# Allegro board TRS80_POWER2.brd
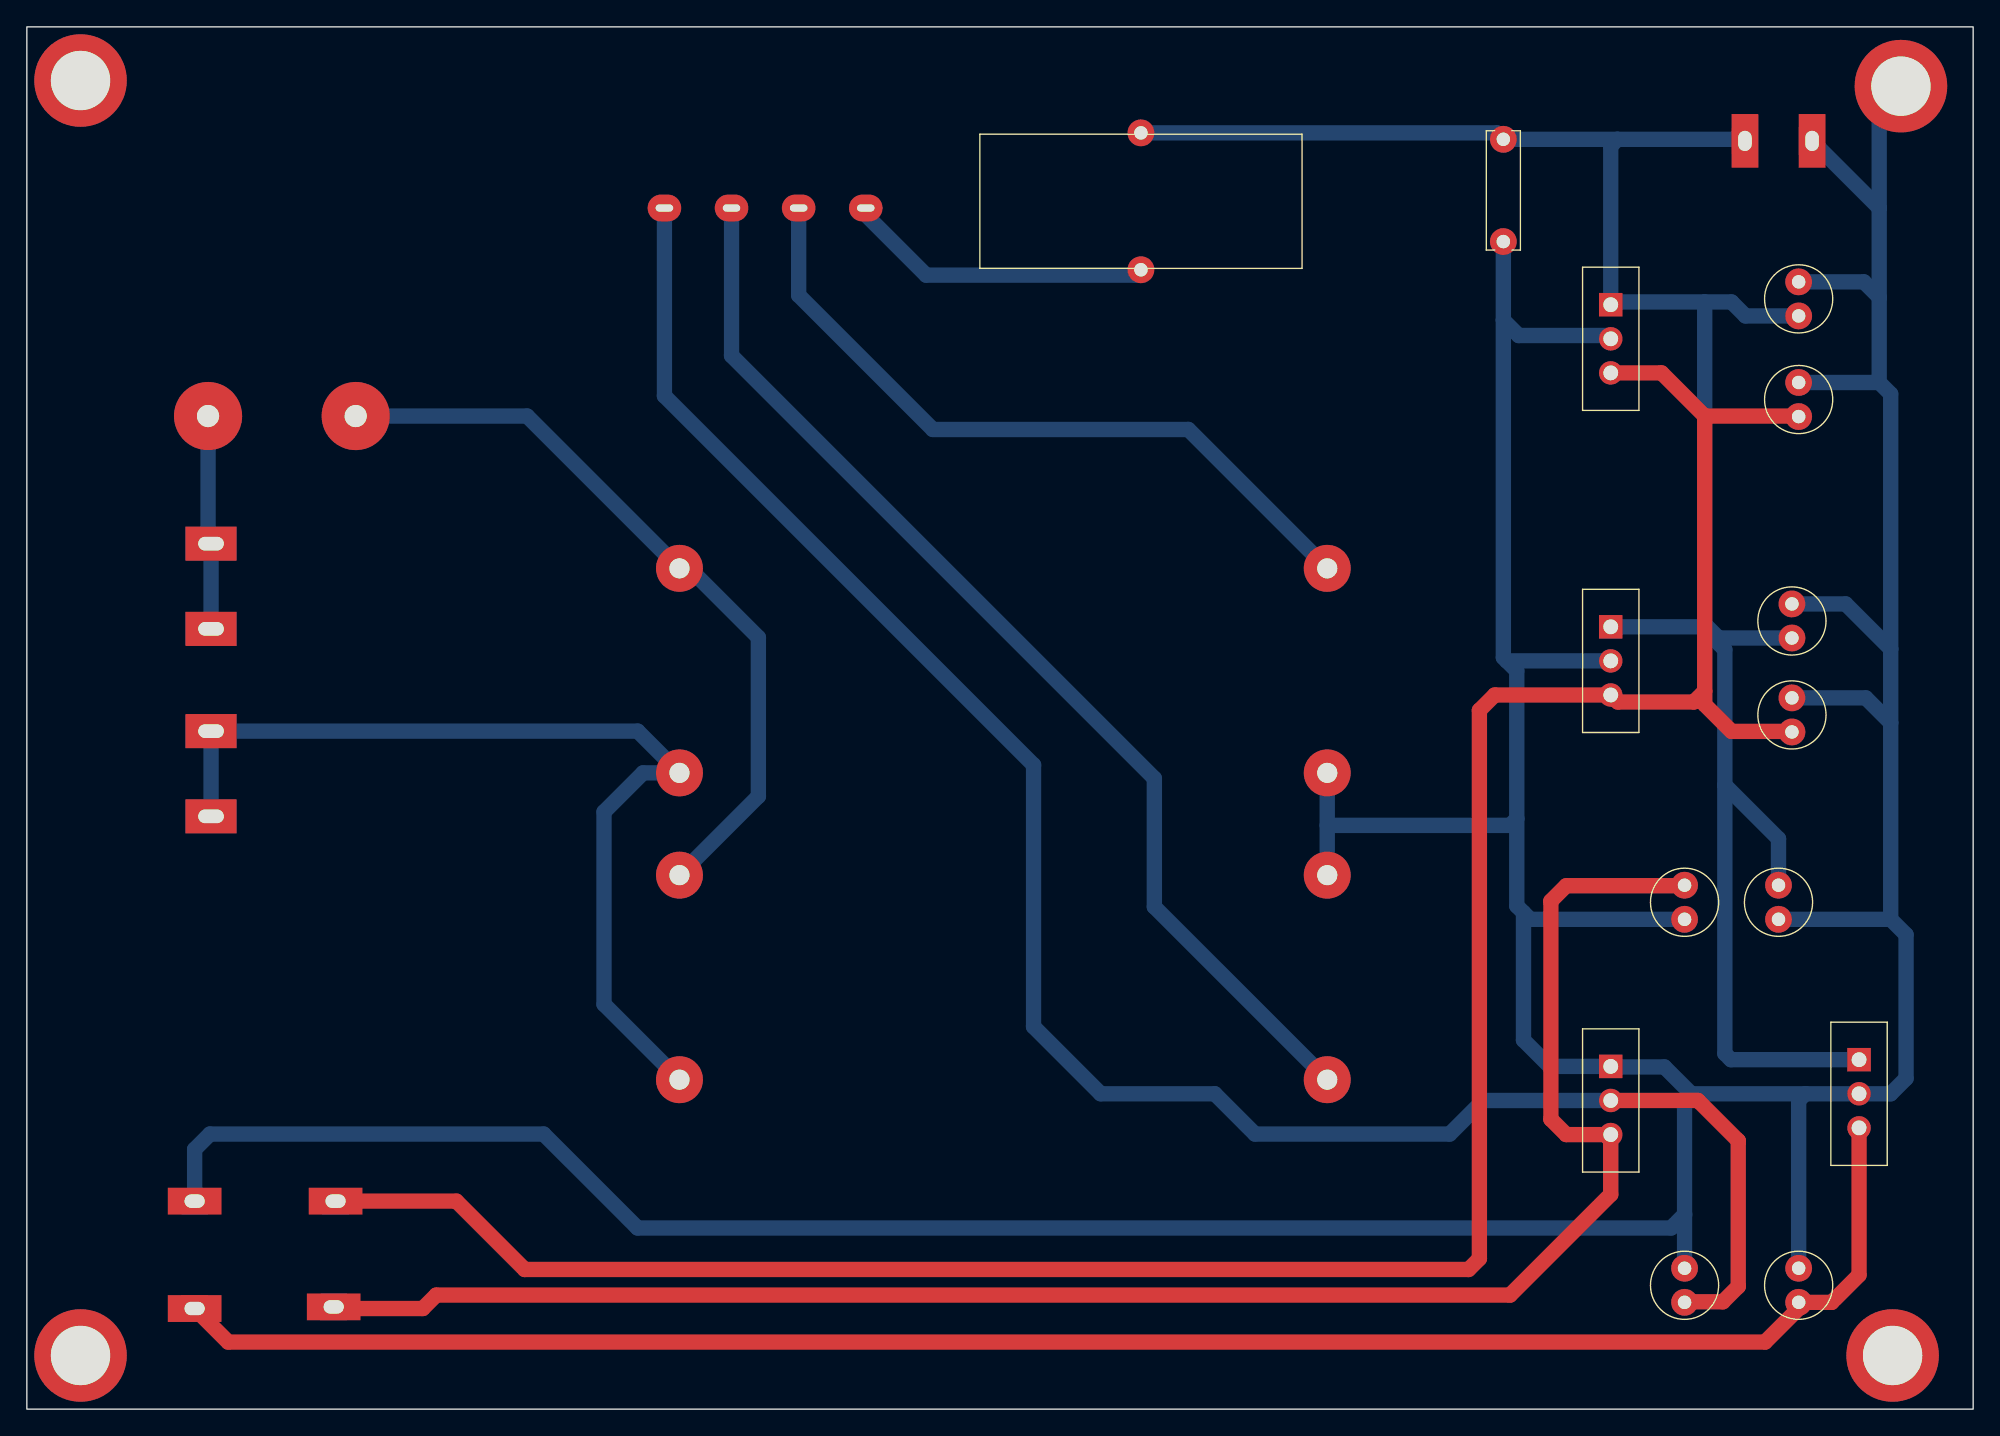
[diagram p0: board, top side]
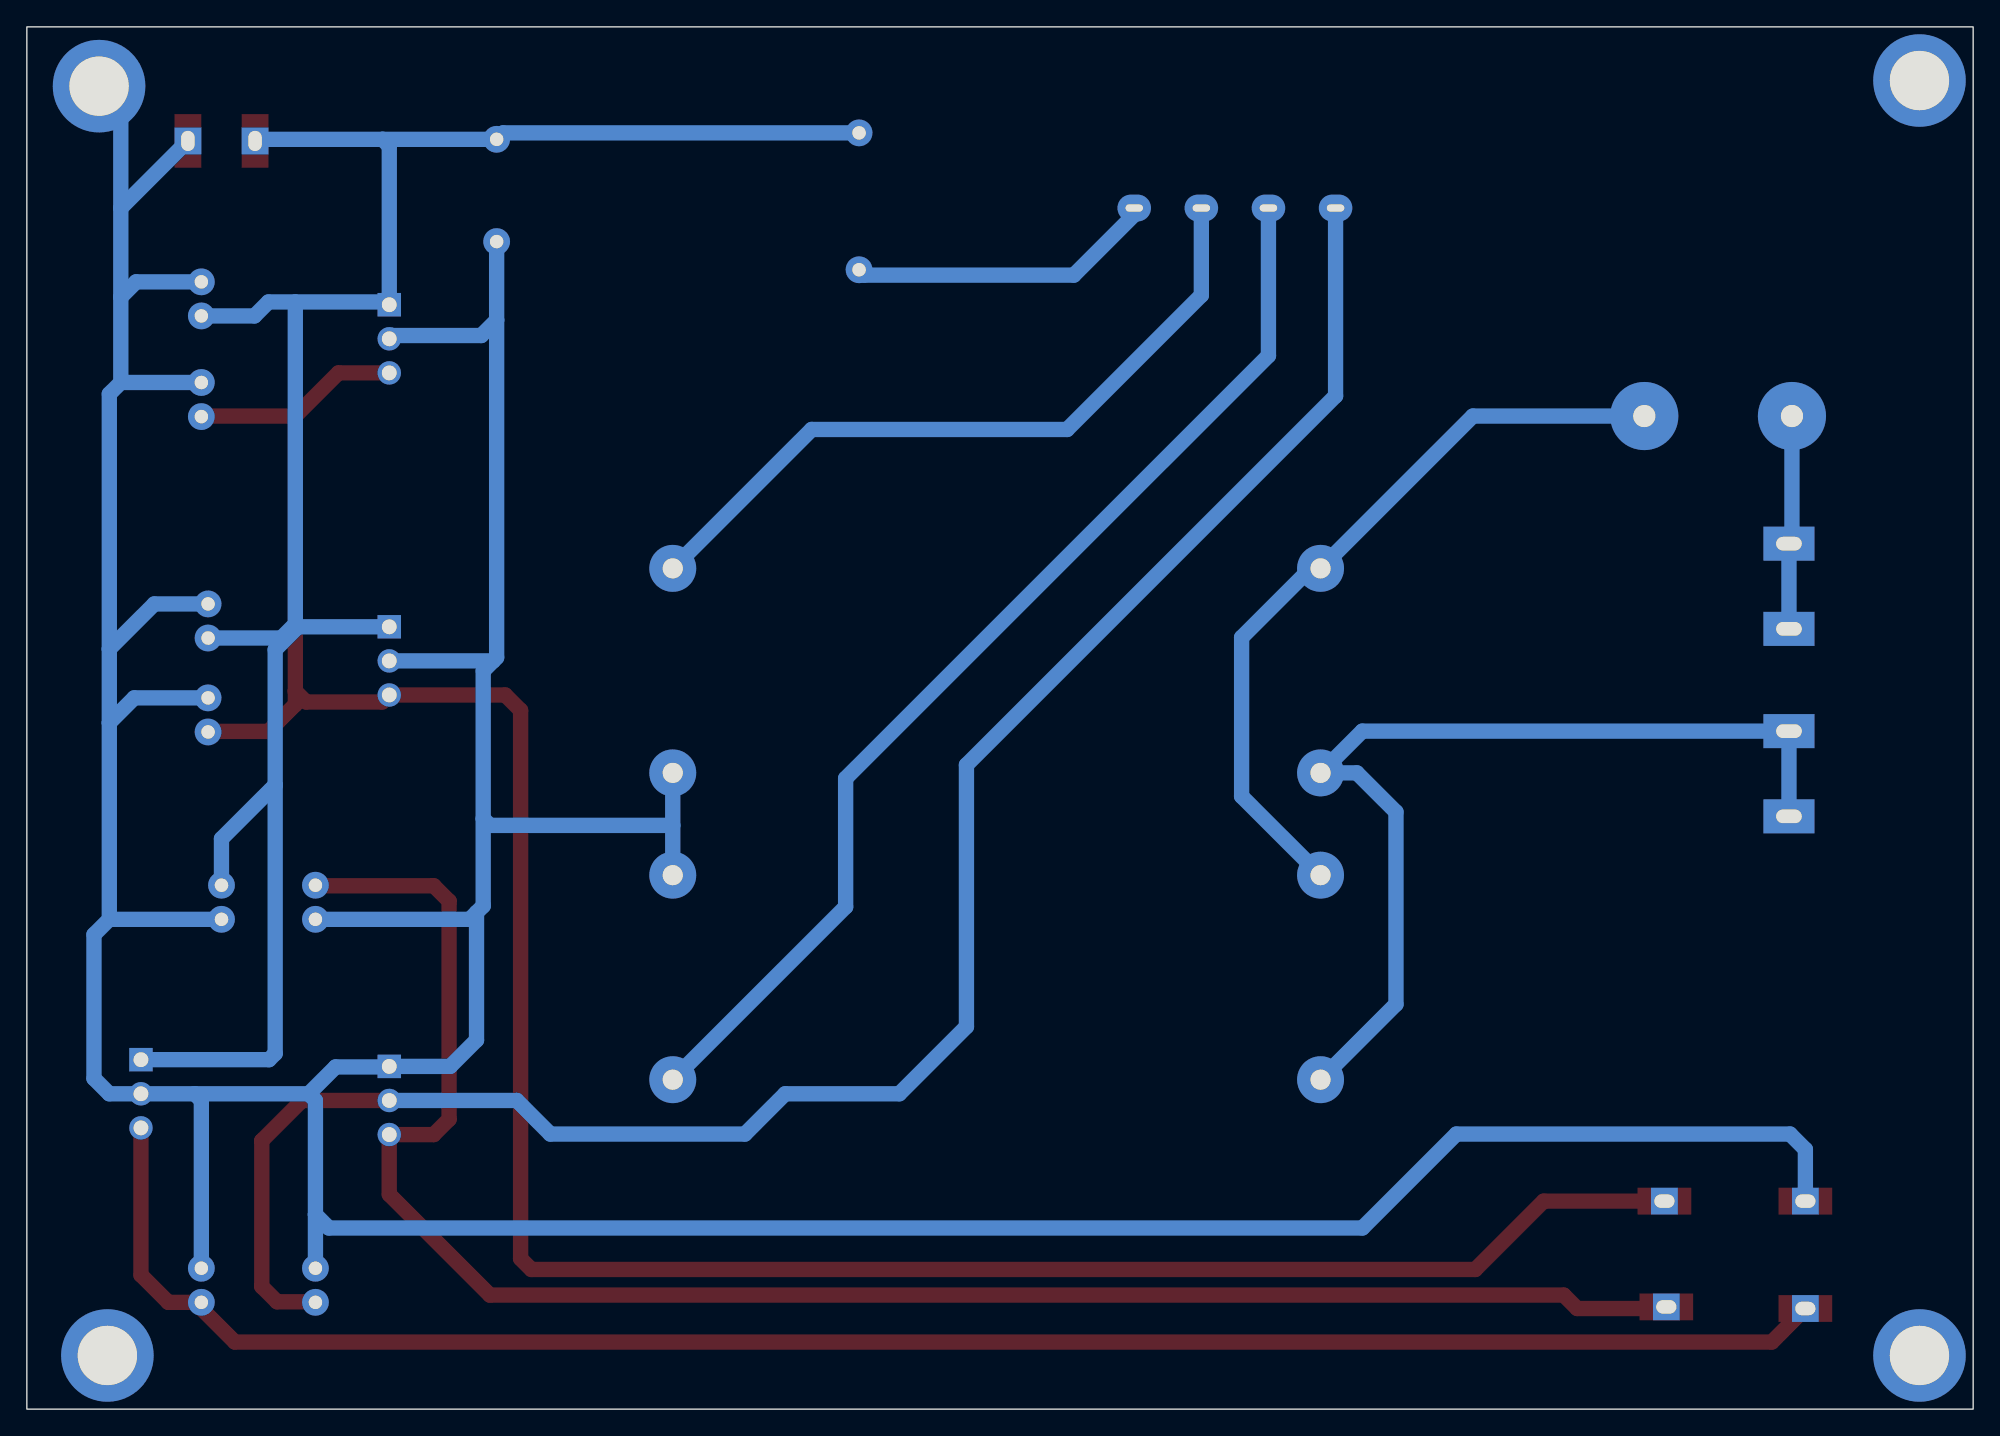
[diagram p1: board, bottom side, seen from below]

Outline 145 x 103 mm; copper layers: TOP, BOTTOM. Coordinates in mm from the lower left corner of the outline.
Outline path: rectangle 0,0 145,103

## Design rules (mm)
nets with their own width: min track width 1; nets 0 N22388 N22675 N22815 N22824 N22896 V6 V12 V+14 V-5 V-14
nets with their own width: min track width 2; nets 120V AC MAINS

## Placement (name value [footprint] x y rotation side)
BR1  gbu4k  [GBU4K]  47.5 89.5 0 top
C2  4.7uF  [CAP196]  132 84 180 top
C3  1n  [CAP196]  132 76.5 180 top
C4  4.7uF  [CAP196]  131.5 60 180 top
C5  1n  [CAP196]  131.5 53 180 top
C7  4.7uF  [CAP196]  130.5 36.5 0 top
C8  4.7uF  [CAP196]  132 10.5 180 top
C10  1n  [CAP300]  110 87 90 top
C11  4.7uF  [CAP196]  123.5 10.5 180 top
C12  4.7uF  [CAP196]  123.5 36.5 0 top
F1  fuse-fc211  [FUSE_FC211]  15.5 65 180 top
J1  CON1  [18AWG_HOLE]  13.5 74 0 top
J2  CON1  [18AWG_HOLE]  24.5 74 0 top
J3  CHASSIS GND  [MOUNT_6_32_GND]  132 93.5 0 top
J4  HEADER 1  [MOUNT_TH]  23 15.5 90 top
J5  HEADER 1  [MOUNT_TH]  22.86 7.62 90 top
J6  HEADER 1  [MOUNT_TH]  12.5 7.5 270 top
J7  HEADER 1  [MOUNT_TH]  12.5 15.5 270 top
J9  HEADER 1  [MOUNT_TH]  128 94.5 0 top
J10  HEADER 1  [MOUNT_TH]  133 94.5 0 top
L1  10uH  [INDUCTOR-MISC]  83 90 90 top
NOREF  -  [unnamed]  4 4 0 top
NOREF#2  -  [unnamed]  4 99 0 top
NOREF#3  -  [unnamed]  139 4 0 top
TR1  Triad-VPP28-2000  [TRIAD-VPP-XFMR]  41 5.5 0 top
U1  LM7806 6V REG  [LM7812ACT]  118 79.76 0 top
U2  LM7806 6V REG  [LM7812ACT]  118 55.76 0 top
U3  lm7812act 12v reg.  [LM7812ACT]  136.5 23.5 0 top
U4  LM7905CT -5V Regulator  [LM7812ACT]  118 23 0 top

## Library data of the parts
BR1 = gbu4k
C2-C5 C7 C8 C11 C12 = C
C10 = C: Tolerance: ***; User Part Number: ***
F1 = fuse-fc211
J1 J2 = CON1
J3-J7 J9 J10 = HEADER 1
L1 = L
TR1 = Triad-VPP28-2000
U1 U2 = LM7806
U3 = lm7812act 12v reg.
U4 = LM7905CT -5V Regulator

## Footprints (pads in the part's own frame, mm; a bottom-side part is the same pattern mirrored in y, then rotated)
18AWG_HOLE
  round 5.08 hole 1.651: 1(0,0)
CAP196
  round 2 hole 1: 1(0,0) 2(0,2.54)
CAP300
  round 2 hole 1: 1(0,0) 2(7.62,0)
FUSE_FC211
  rect 3.81x2.54 hole 1.905x1.016: 1(1.778,0.508) 2(1.778,6.858) 3(1.778,14.478) 4(1.778,20.828)
GBU4K
  oval 2.5x2 hole 1.3x0.53: 1(0,0) 2(5,0) 3(10,0) 4(15,0)
INDUCTOR-MISC
  round 2 hole 1: 1(-5.1,0) 2(5.1,0)
LM7812ACT
  rect 1.75x1.75 hole 1.1: 1(0,2.54)
  round 1.75 hole 1.1: 2(0,0) 3(0,-2.54)
MOUNT_6_32_GND
  round 6.9 hole 4.42: 1(7.62,5.08)
MOUNT_TH
  rect 2x4 hole 1x1.5: 1(0,0)
TRIAD-VPP-XFMR
  round 3.5 hole 1.5: 1(7.62,19.05) 2(7.62,34.29) 3(7.62,41.91) 4(7.62,57.15) 5(55.88,19.05) 6(55.88,34.29) 7(55.88,41.91) 8(55.88,57.15)
unnamed
  round 6.9 hole 4.42: (0,0)

## Nets
120V AC MAINS: F1.1 F1.2 J1.1
V6: C3.2 C5.2 J4.1 U1.3(OUT) U2.3(OUT)
V12: C8.2 J6.1 U3.3(OUT)
0: C2.1 C3.1 C4.1 C5.1 C7.1 C8.1 C10.1 C11.1 C12.1 J3.1 J7.1 J10.1 TR1.6 TR1.7 U1.2(GND) U2.2(GND) U3.2(GND) U4.1(GND)
V+14: C2.2 C4.2 C7.2 C10.2 J9.1 L1.2 U1.1(IN) U2.1(IN) U3.1(IN)
V-5: C12.2 J5.1 U4.3(OUT)
V-14: BR1.1(DC-) C11.2 U4.2(IN)
N22388: J2.1 TR1.2 TR1.4
N22675: F1.3 F1.4 TR1.1 TR1.3
N22815: BR1.2(AC#2) TR1.5
N22824: BR1.3(AC#3) TR1.8
N22896: BR1.4(DC+) L1.1

## Routing (per net, layer and track width the routed paths; a pad name or vN(x,y) marks a point on that pad's centre or on a via; arc(x,y) is an arc through that point)
120V AC MAINS: length 15.9
  BOTTOM w1.143: J1.1 13.5,64.71 F1.1 F1.2
V6: length 190.5
  TOP w1.143: 125,53.5 125,52.5 127,50.5 131.46,50.5 C5.2 ; 125,53.5 124.19,52.69 118.52,52.69 U2.3 109.36,53.22 108.21,52.07 108.21,11.22 107.41,10.41 37.09,10.41 32,15.5 J4.1 ; 125,53.5 125,74 ; U1.3 121.78,77.22 125,74 ; C3.2 131.96,74 125,74
V12: length 138.3
  TOP w1.143: U3.3 136.5,10 134.46,7.96 C8.2 132,7.5 129.5,5 15,5 J6.1
0: length 406.5
  BOTTOM w1.143: 124,23.5 132.5,23.5 ; 124,23.5 123.5,23 123.5,14.5 ; 124,23.5 122,25.5 118.04,25.5 U4.1 113.46,25.54 111.5,27.5 111.5,37 ; 132.5,23.5 132,23 C8.1 ; 132.5,23.5 U3.2 138.86,23.5 140,24.64 140,35.36 138.86,36.5 ; J3.1 138,96.96 138,89.5 ; C2.1 136.86,84 138,82.86 ; 138,76.5 138.86,75.64 138.86,56.64 ; 138,76.5 138,82.86 ; 138,76.5 C3.1 ; 138,82.86 138,89.5 ; 138,89.5 J10.1 ; 111.5,37 112,36.5 C12.1 ; 111.5,37 111,37.5 111,44 ; 138.86,56.64 138.86,51.14 ; 138.86,56.64 135.5,60 C4.1 ; 138.86,51.14 138.86,36.5 ; 138.86,51.14 137,53 C5.1 ; 110.25,55.76 U2.2 ; 110.25,55.76 111,55.01 111,44 ; 110.25,55.76 110,56.01 110,81.14 ; 110,81.14 111.14,80 117.76,80 U1.2 ; 110,81.14 C10.1 ; C7.1 138.86,36.5 ; 123.5,14.5 C11.1 ; 123.5,14.5 122.5,13.5 45.5,13.5 38.5,20.5 13.64,20.5 12.5,19.36 J7.1 ; TR1.7 96.88,43.5 ; 96.88,43.5 110.5,43.5 111,44 ; 96.88,43.5 TR1.6
V+14: length 162.1
  BOTTOM w1.143: C7.2 130.5,42.5 126.5,46.5 ; 126.5,46.5 126.5,56.59 124.79,58.3 ; 126.5,46.5 126.5,26.5 126.96,26.04 U3.1 ; 125,58.5 124.79,58.3 ; 125,58.5 125,82.5 ; 125,58.5 126.04,57.46 C4.2 ; 124.79,58.3 U2.1 ; 118.5,94.62 127.88,94.62 J9.1 ; 118.5,94.62 118,94.12 U1.1 118.2,82.5 125,82.5 ; 118.5,94.62 C10.2 109.52,95.1 L1.2 ; 125,82.5 127,82.5 128.04,81.46 C2.2
V-5: length 134.8
  TOP w1.143: J5.1 22.98,7.5 29.5,7.5 30.5,8.5 110.5,8.5 118,16 U4.3 114.68,20.46 113.54,21.6 113.54,37.86 114.68,39 123.46,39 C12.2
V-14: length 145.8
  TOP w1.143: C11.2 123.54,8 126.36,8 127.5,9.14 127.5,20 124.5,23 U4.2
  BOTTOM w1.143: U4.2 108.5,23 106,20.5 91.5,20.5 88.5,23.5 80,23.5 75,28.5 75,48 47.5,75.5 BR1.1
N22388: length 57
  BOTTOM w1.143: TR1.2 54.5,45.67 54.5,57.5 49.35,62.65 TR1.4 37.27,74 J2.1
N22675: length 71.6
  BOTTOM w1.143: F1.4 F1.3 45.51,50.52 TR1.3 45.91,47.41 43,44.5 43,30.17 TR1.1
N22815: length 83.3
  BOTTOM w1.143: BR1.2 52.5,78.5 84,47 84,37.43 TR1.5
N22824: length 54.3
  BOTTOM w1.143: TR1.8 86.53,73 67.5,73 57.5,83 BR1.3
N22896: length 23
  BOTTOM w1.143: L1.1 82.6,84.5 67,84.5 62.5,89 BR1.4
